# Altium PCB sense_logic.PcbDoc
Units mil, origin at the board's own origin, x right, y up, seen from the top; angles counter-clockwise.
Board outline 866.14 x 866.14 mil, 4 copper layers (Top Layer, Int1 (SIG/GND), Int2 (SIG/PWR), Bottom Layer), stack 53.912 mil thick; 27 components, 24 nets, 157 pads, 95 vias.
Unrouted connection lines stored in the file: 39.
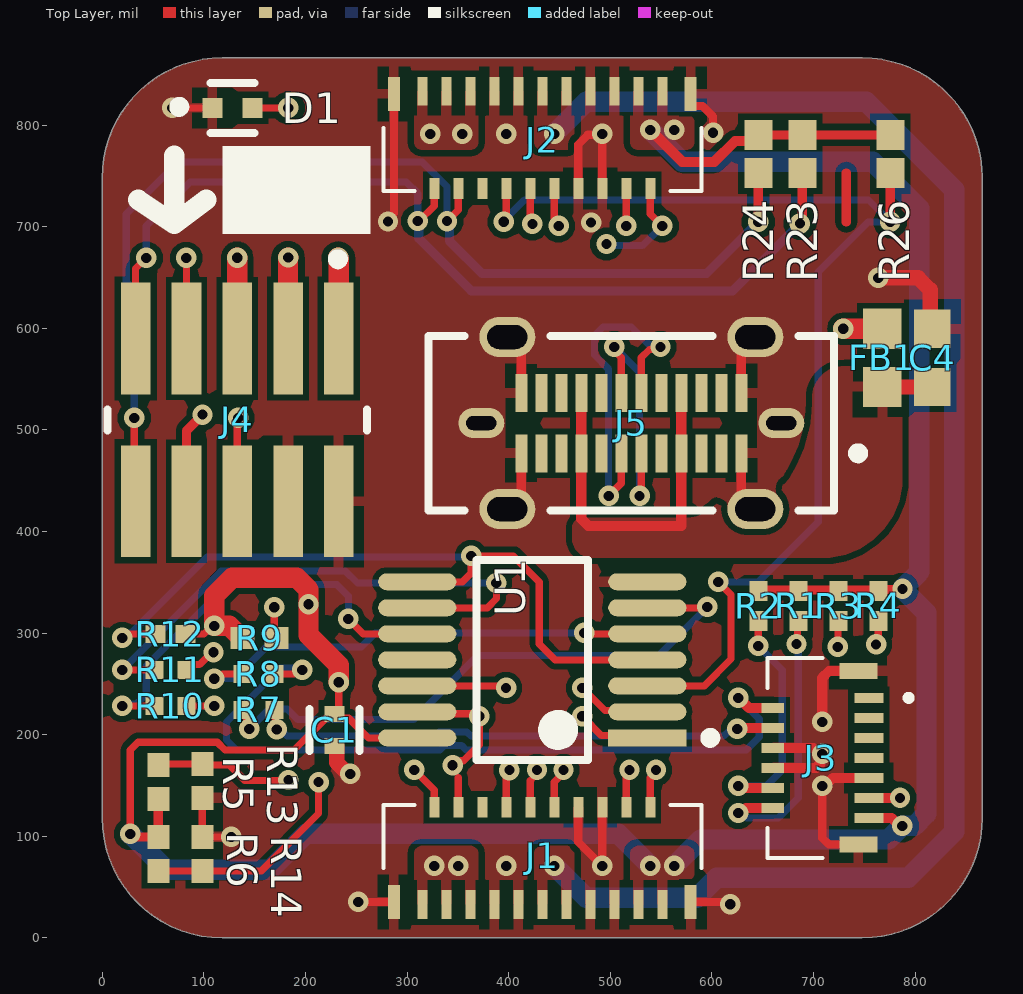
[diagram p0: Top Layer view]
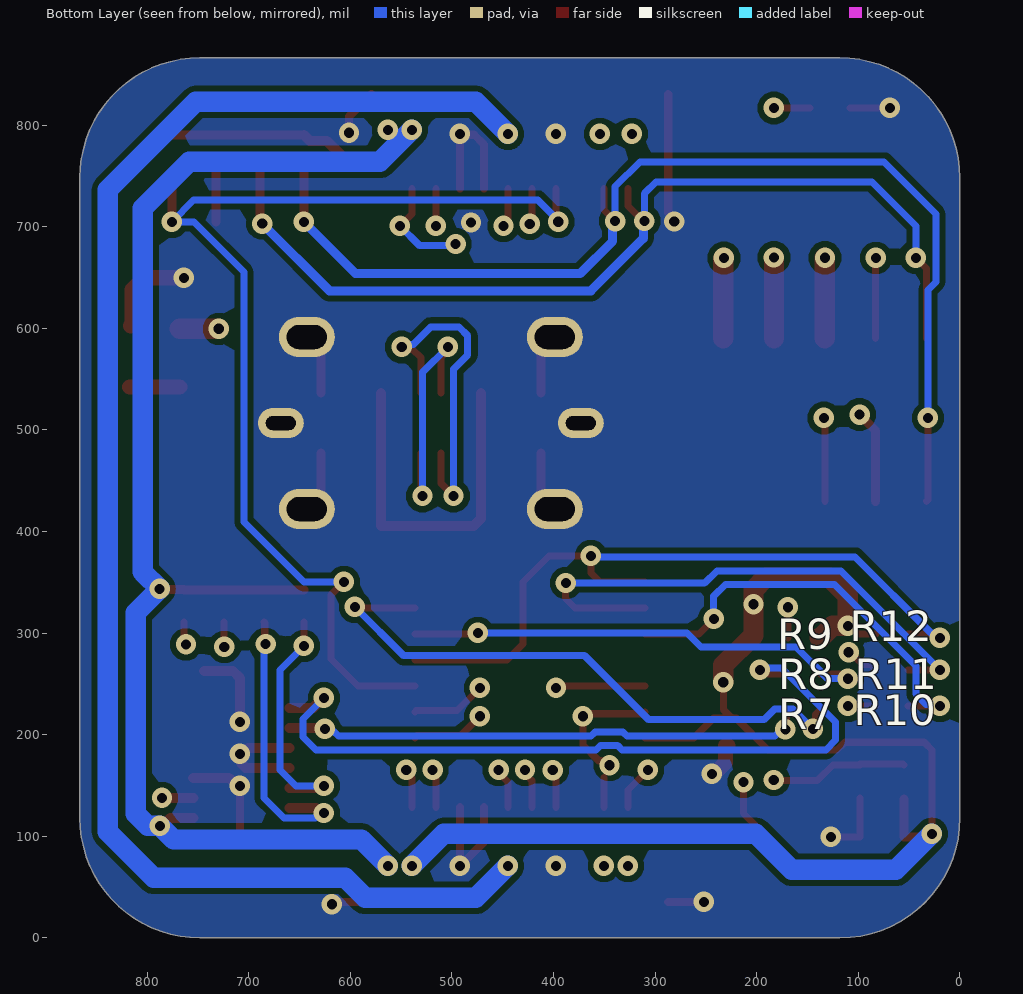
[diagram p1: Bottom Layer view, seen from below]
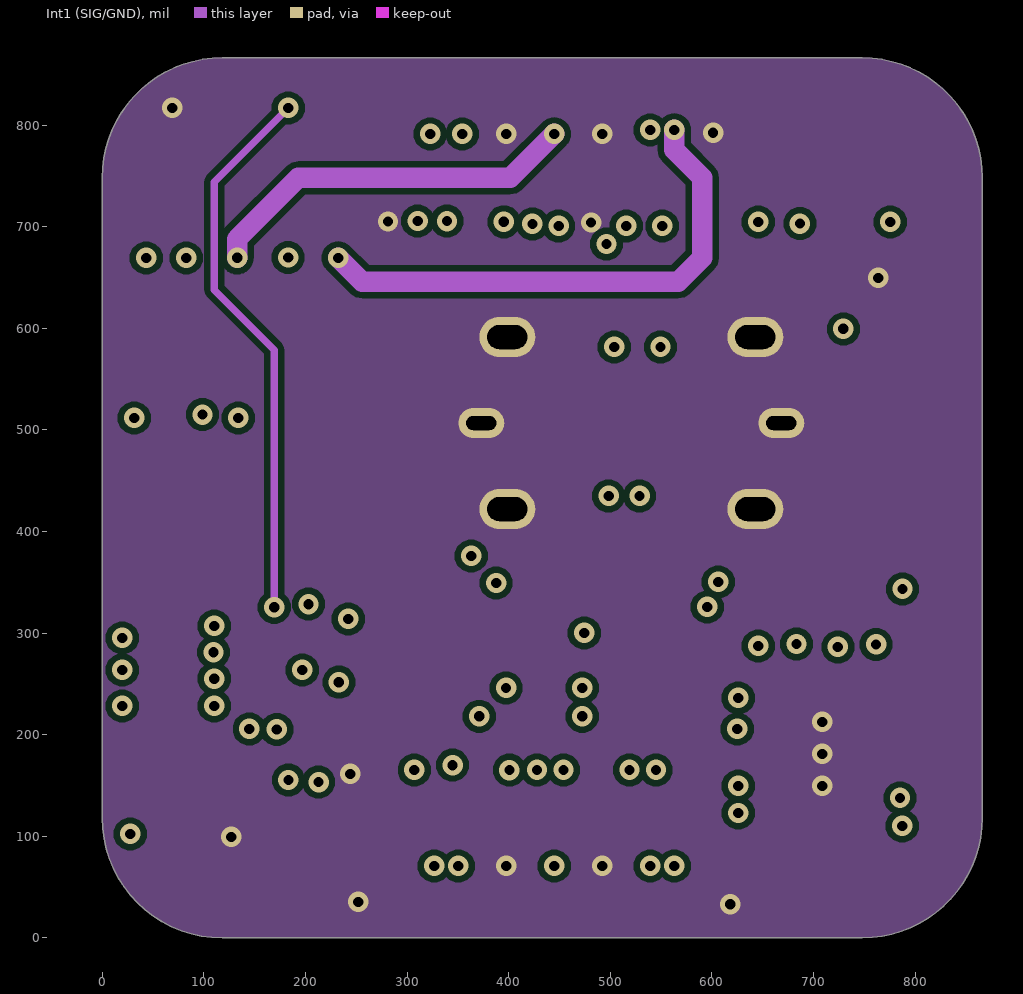
[diagram p2: Int1 (SIG/GND)]
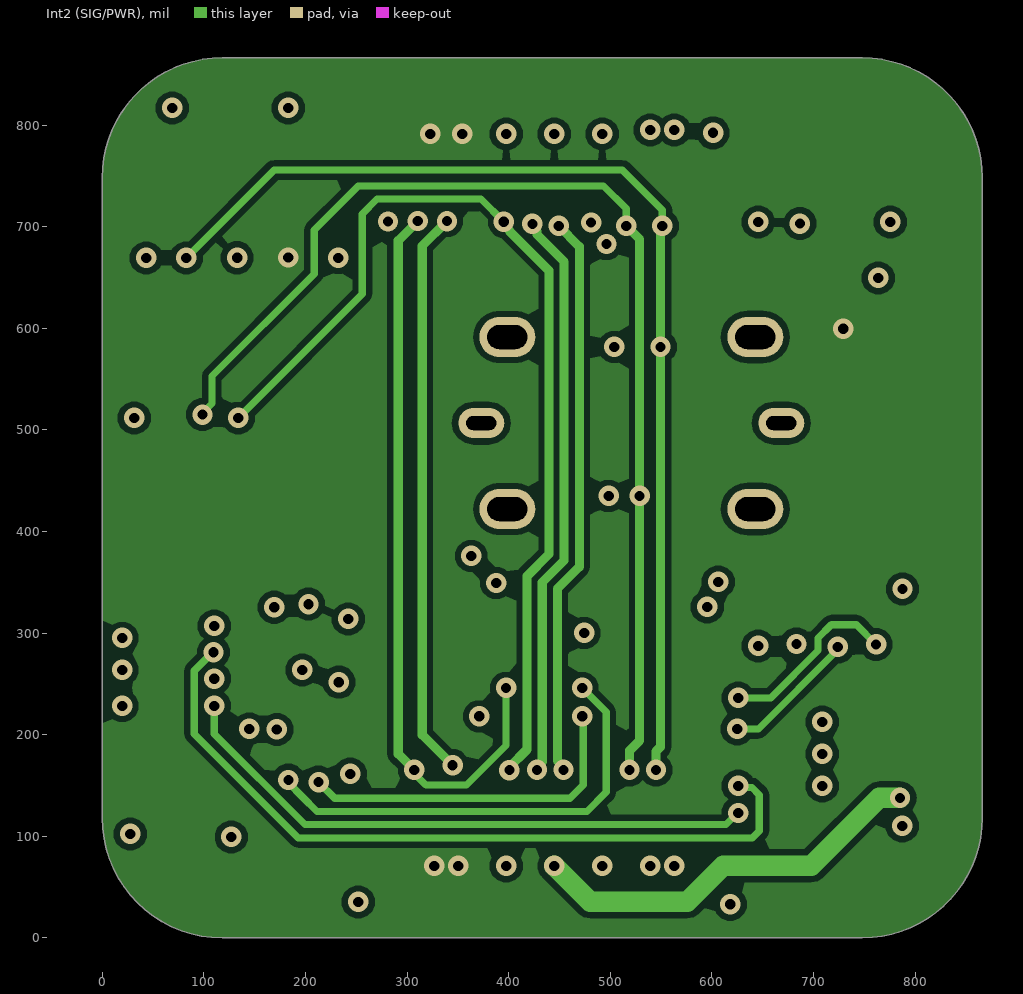
[diagram p3: Int2 (SIG/PWR)]

## Layer stack, top to bottom
Top Solder: solder mask 1, SM-001, Dk 4
Top Layer: signal copper 1.378
Dielectric 1: prepreg 5.1, PP-017, Dk 4.3
Dielectric 2: prepreg 5.1, PP-017, Dk 4.3
Int1 (SIG/GND): signal copper 1.378
Dielectric 3: core 28, Core-039, Dk 4.8
Int2 (SIG/PWR): signal copper 1.378
Dielectric 4: prepreg 5.1, PP-017, Dk 4.3
Dielectric 5: prepreg 5.1, PP-017, Dk 4.3
Bottom Layer: signal copper 1.378
Bottom Solder: solder mask 1, SM-001, Dk 4

## Board outline
0,118.11 0,748.03 cw(c118.11,748.03) 118.11,866.14 748.03,866.14 cw(c748.03,748.03) 866.14,748.03 866.14,118.11 cw(c748.03,118.11) 748.03,0 118.11,0 cw(c118.11,118.11)

## Design rules (kind name [scope] priority, off if disabled: settings)
Clearance [All] p1: gap=6 ignorepadtopadclearanceinfootprint=FALSE
PolygonConnect [All] p1: thpad.connectstyle=Direct thpad.reliefconductorwidth=10 thpad.reliefentries=4 thpad.polygonreliefangle="90 Angle" thpad.airgapwidth=10 smdpad.connectstyle=Relief smdpad.reliefconductorwidth=10 smdpad.reliefentries=4 smdpad.polygonreliefangle="90 Angle" smdpad.airgapwidth=10 via.connectstyle=Direct via.reliefconductorwidth=10 via.reliefentries=4 via.polygonreliefangle="90 Angle" via.airgapwidth=10
RoutingVias [All] p1: holewidth=28 width=50 viastyle="Through Hole" minholewidth=28 minwidth=50 maxholewidth=28 maxwidth=50
SolderMaskExpansion [IsVia] p1: expansion=4 istentingtop=TRUE
Width [All] p1: maxlimit=20 minlimit=6 preferedwidth=10
30 further rules are at their usual default settings.

## Classes and differential pairs
component class AUX_CONNECTOR: J4
component class LOGIC_CONNECTOR: J3 R1 R2 R3 R4
component class USB_CONNECTOR: C4 FB1 J5
component class SPINE_CONNECTOR: J1 J2
component class LOGIC: C1 D1 R5 R6 R7 R8 R9 R10 R11 R12 R13 R14 R23 R24 R26 U1

## Components (designator, comment, footprint, x,y, rotation, side; value= is the part's Value field where it differs from the comment)
C1 "0.1uF" FP-GRM15-MFG 228.35,204.72 r270 top value=0.10μF
C4 "22uF" FP-CL10-IPC_B 816.93,570.87 r90 top
D1 "QBLP595-IB" FP-QBLP595-IB-MFG 127.95,816.93 r0 top
FB1 "MPZ1608S601ATD25" FP-MPZ1608-0_8-IPC_B 767.72,570.87 r90 top
J1 "503566-2102" 5035662102 433.07,78.74 r0 top locked
J2 "503566-2102" 5035662102 433.07,787.4 r180 top locked
J3 "502078-1362" 5020781362 708.66,177.17 r90 top locked
J4 "FTSH-105-01-F-DV-K-TR" FP-FTSH-105-01-F-DV-K-TR-MFG 132.87,509.84 r180 top
J5 "204711-0001" FP-204711-0001-MFG 520.67,506.69 r180 top locked
R1 "1K" RESC1005X40X25LL05T10 685.04,326.77 r90 top
R2 "1K" RESC1005X40X25LL05T10 645.67,326.77 r90 top
R3 "1K" RESC1005X40X25LL05T10 724.41,326.77 r90 top
R4 "1K" RESC1005X40X25LL05T10 763.78,326.77 r90 top
R5 "DNP" RESC1005X40X25NL05T10 55.12,153.54 r270 top
R6 "DNP" RESC1005X40X25NL05T10 55.12,82.68 r90 top
R7 "33R" RESC1005X40X25LL05T05 153.54,224.41 r0 top
R8 "33R" RESC1005X40X25LL05T05 153.54,259.84 r0 top
R9 "330R" RESC1005X40X25NL05T10 154.53,295.28 r0 top
R10 "33R" RESC1005X40X25LL05T05 66.93,228.35 r0 top
R11 "33R" RESC1005X40X25LL05T05 66.93,263.78 r0 top
R12 "1K" RESC1005X40X25LL05T10 66.93,299.21 r0 top
R13 "DNP" RESC1005X40X25NL05T10 98.43,154.53 r90 top
R14 "DNP" RESC1005X40X25NL05T10 98.43,82.68 r270 top
R23 "DNP" RESC1005X40X25ML10T10 688.98,771.65 r90 top
R24 "DNP" RESC1005X40X25ML10T10 645.67,771.65 r90 top
R26 "DNP" RESC1005X40X25ML10T10 775.59,771.65 r90 top
U1 "TCA9543APWR" FP-PW0014A-IPC_A 423.23,273.62 r180 top locked

## Footprints (in the part's own frame and the unit in brackets; to place one, negate y for a bottom-side part, rotate by r counter-clockwise, add the part's x,y. Pads: shape width x height; smd on the part's side, far side on the other; paste and mask are expansions set on the pad)
5020781362 [mm]
  rect 0.25x0.72 smd: 1(1.5,-1.165) 3(1,-1.165) 5(0.5,-1.165) 7(0,-1.165) 9(-0.5,-1.165) 11(-1,-1.165) 13(-1.5,-1.165)
  rect 0.25x0.57 smd: 2(1.25,1.24) 4(0.75,1.24) 6(0.25,1.24) 8(-0.25,1.24) 10(-0.75,1.24) 12(-1.25,1.24)
  rect 0.4x0.95 smd: MP1(2.17,-0.9) MP2(-2.17,-0.9)
  silkscreen extent -2.5,-2.21 2.5,1.38, body extent -2.5,-1.63 2.5,1.36, height 1
5035662102 [mm]
  rect 0.25x0.72 smd: 1(-3,-1.165) 3(-2.4,-1.165) 5(-1.8,-1.165) 7(-1.2,-1.165) 9(-0.6,-1.165) 11(0,-1.165) 13(0.6,-1.165) 15(1.2,-1.165) 17(1.8,-1.165) 19(2.4,-1.165) 21(3,-1.165)
  rect 0.25x0.52 smd: 2(-2.7,1.265) 4(-2.1,1.265) 6(-1.5,1.265) 8(-0.9,1.265) 10(-0.3,1.265) 12(0.3,1.265) 14(0.9,1.265) 16(1.5,1.265) 18(2.1,1.265) 20(2.7,1.265)
  rect 0.3x0.85 smd: MP1(-3.71,-1.1) MP2(3.71,-1.1)
  silkscreen extent -3.98,-0.25 3.98,1.33, body extent -3.98,-1.54 3.98,1.31, height 0.95
FP-204711-0001-MFG [mm]
  rrect100% 1.4x1 hole 0.6 slot 1 at 0 deg paste-1000 mask+0: 1(-3.1,2.15) 2(3.1,2.15) 5(-3.1,-2.15) 6(3.1,-2.15)
  rrect100% 1.15x0.75 hole 0.35 slot 0.75 at 0 deg paste-1000 mask+0: 3(-3.75,0) 4(3.75,0)
  rect 0.3x0.95 smd paste+0 mask+0: A1(-2.75,0.755) A2(-2.25,0.755) A3(-1.75,0.755) A4(-1.25,0.755) A5(-0.75,0.755) A6(-0.25,0.755) A7(0.25,0.755) A8(0.75,0.755) A9(1.25,0.755) A10(1.75,0.755) A11(2.25,0.755) A12(2.75,0.755) B1(2.75,-0.755) B2(2.25,-0.755) B3(1.75,-0.755) B4(1.25,-0.755) B5(0.75,-0.755) B6(0.25,-0.755) B7(-0.25,-0.755) B8(-0.75,-0.755) B9(-1.25,-0.755) B10(-1.75,-0.755) B11(-2.25,-0.755) B12(-2.75,-0.755)
  silkscreen extent -5.79,-2.18 5.07,2.18, body extent -5.17,-2.75 5.17,2.75, height 0.25
FP-CL10-IPC_B [mil]
  rect 37.72x35.91 smd paste+0 mask+0: 1(-28.62,0) 2(28.62,0)
  body extent -57,-28 57,28, height 10
FP-FTSH-105-01-F-DV-K-TR-MFG [mm]
  rect 0.74x2.79 smd paste+0 mask+0: 1(-2.54,-2.035) 2(-2.54,2.035) 3(-1.27,-2.035) 4(-1.27,2.035) 5(0,-2.035) 6(0,2.035) 7(1.27,-2.035) 8(1.27,2.035) 9(2.54,-2.035) 10(2.54,2.035)
  silkscreen extent -3.24,-4.14 3.24,0.27, body extent -3.34,-3.53 3.34,3.53, height 0.25
FP-GRM15-MFG [mm]
  rect 0.4x0.5 smd paste+0 mask+0: 1(-0.4,0) 2(0.4,0)
  silkscreen extent -0.53,-0.63 0.53,0.63, body extent -0.7,-0.38 0.7,0.38, height 0.25
FP-MPZ1608-0_8-IPC_B [mil]
  rect 39.61x37.73 smd paste+0 mask+0: 1(-28.59,0) 2(28.59,0)
  body extent -58,-29 58,29, height 10
FP-PW0014A-IPC_A [mm]
  rect 1.955x0.421 smd paste+0 mask+0: 1(-2.875,1.95)
  rrect100% 1.955x0.421 smd paste+0 mask+0: 2(-2.875,1.3) 3(-2.875,0.65) 4(-2.875,0) 5(-2.875,-0.65) 6(-2.875,-1.3) 7(-2.875,-1.95) 8(2.875,-1.95) 9(2.875,-1.3) 10(2.875,-0.65) 11(2.875,0) 12(2.875,0.65) 13(2.875,1.3) 14(2.875,1.95)
  silkscreen extent -4.58,-2.5 1.4,2.5, body extent -4.35,-3 4.35,3, height 0.25
FP-QBLP595-IB-MFG [mm]
  rect 0.5x0.5 smd paste+0 mask+0: 1(-0.5,0) 2(0.5,0)
  silkscreen extent -1.45,-0.63 0.55,0.63, body extent -0.85,-0.4 0.85,0.4, height 0.25
RESC1005X40X25LL05T05 [mm] "Chip Resistor, 2-Leads, Body 1.00x0.50mm, IPC High Density"
  rect 0.45x0.45 smd: 1(-0.4,0) 2(0.4,0)
  body extent -0.53,-0.27 0.53,0.28, height 0.4
RESC1005X40X25LL05T10 [mm] "Chip Resistor, 2-Leads, Body 1.00x0.50mm, IPC High Density"
  rect 0.5x0.45 smd: 1(-0.375,0) 2(0.375,0)
  body extent -0.53,-0.27 0.53,0.28, height 0.4
RESC1005X40X25ML10T10 [mm] "Chip Resistor, 2-Leads, Body 1.00x0.50mm, IPC Low Density"
  rect 0.75x0.7 smd: 1(-0.475,0) 2(0.475,0)
  body extent -0.55,-0.3 0.55,0.3, height 0.4
RESC1005X40X25NL05T10 [mm] "Chip Resistor, 2-Leads, Body 1.00x0.50mm, IPC Medium Density"
  rect 0.6x0.55 smd: 1(-0.425,0) 2(0.425,0)
  body extent -0.53,-0.27 0.53,0.28, height 0.4

## Part data
C1: library part CMP-2100-03641-2, "CAP CER 0.1UF 16V X7R 0402", Capacitance=0.10μF, Manufacturer=Murata, Manufacturer Part Number=GRM155R71C104KA88D, Package=GRM15, Temperature="-55°C to +125°C", Temperature Characteristic=X7R, Temperature Range High=+125°C, Temperature Range Low=-55°C, Tolerance=10%, Voltage Rating=16Vdc, Category=Cap, ComponentLink2Description=Datasheet, ComponentLink2URL=https://search.murata.co.jp/Ceramy/image/img/A01X/G101/ENG/GRM155R71H471KA01-01A.pdf, Device Class L1="Passive Components", Device Class L2=Capacitors, Device Class L3="Ceramic Capacitors", Digikey Description="CAP CER 0.1UF 16V X7R 0402", Height=0.55mm, Ipc Land Pattern Name=CAPC10050X219, Lead Free=yes, Material=Ceramic, Mouser Description="0402 0.1 uF 16V ±10 % Tolerance X7R SMT Multilayer Ceramic Capacitor", Octopart=https://octopart.com/grm155r71c104ka88d-murata-196880, RoHS=TRUE, Standoff Height=0mm
C4: library part CMP-13271-003290-1, "Cap Ceramic 22uF 10V X5R ±20% Pad SMD 0603 +85°C T/R", Case Code (Imperial)=0603, Case Code (Metric)=1608, Max Operating Temperature=85°C, Min Operating Temperature=-55°C, Tolerance=20%, Voltage Rating=10V, Capacitance=22uF, Case/Package=0603, Length=0.063inch, Mount="Surface Mount", Packaging="Tape and Reel", Thickness=0.037inch, Width=0.031inch
D1: library part CMP-113271-000002-1, "LED BLUE CLEAR 0402 SMD", Case Code (Imperial)=0402, Case Code (Metric)=1005, Color=Blue, Forward Voltage=3.1V, Lens Color=Colorless, Test Current=20mA, Case/Package=0402, Dominant Wavelength=465nm, Height=0.6mm, Length=1mm, Lens Size=0.5mm, Lens Style=Flat, Lens Transparency=Clear, Luminous Intensity=85mcd, Mount="Surface Mount", Packaging="Tape and Reel", Viewing Angle=140°, Width=0.5mm
FB1: library part CMP-08257-000403-1, "Power line Ferrite Bead 600Ω @ 100MHz 1A DCR 0.15Ω AEC-Q200 SMD 0603", Case Code (Imperial)=0603, Case Code (Metric)=1608, DC Resistance (DCR)=150mR, Max Current Rating=1A, Max Operating Temperature=125°C, Min Operating Temperature=-55°C, Package Quantity=4000, Ratings=AEC-Q200, Test Frequency=100MHz, Tolerance=25%, Case/Package=0603, Height=0.037inch, Impedance=600R, Lead Free="Lead Free", Length=0.063inch, Max DC Current=1A, Mount="Surface Mount", Number of Lines=1, Packaging="Tape and Reel", RoHS Compliant=Yes, Series=MPZ, Termination=SMD/SMT, Weight=7.1E-05oz, Width=0.031inch
J1 J2: "Connector", Manufacturer_Name=Molex, Mouser Part Number=538-503566-2102, Datasheet Link=https://www.molex.com/pdm_docs/sd/5035662102_sd.pdf, Height=1.69mm, Manufacturer_Part_Number=503566-2102, Mouser Price/Stock=https://www.mouser.co.uk/ProductDetail/Molex/503566-2102?qs=0lSvoLzn4L8%252Bw2FHrppS3g%3D%3D
J3: "Connector", Manufacturer_Name=Molex, Mouser Part Number=538-502078-1362, Datasheet Link=https://www.molex.com/pdm_docs/sd/5020781362_sd.pdf, Height=1.7mm, Manufacturer_Part_Number=502078-1362, Mouser Price/Stock=https://www.mouser.co.uk/ProductDetail/Molex/502078-1362?qs=GBLSl2Akirt8csfPYHMErA%3D%3D
J4: library part CMP-02766-000004-2, "CONN HEADER SMD 10POS 1.27MM", Housing Color=Black, Max Current Rating=1.75A, Max Operating Temperature=125°C, Min Operating Temperature=-55°C, Contact Material=Bronze, Contact Plating=Gold, Depth=3.43mm, Housing Material=Polymer, Lead Free="Lead Free", Length=6.35mm, Number Of Contacts=10, Number of Rows=2, Orientation=Straight, Packaging="Tape and Reel", Pitch=1.27mm, Radiation Hardening=No, Termination=Solder
J5: library part CMP-04767-000011-1, "USB VERTICAL TYPE C 3.1"
R1 R2 R3 R4 R12: library part CMP-2002-07941-1, Manufacturer="Yageo / Phycomp", Part Number=RC0402JR-071KL
R5 R6 R13 R14: library part CMP-1011-00001-2, Manufacturer="Yageo / Phycomp", Part Number=RC0402JR-070RL
R7 R8 R10 R11: library part CMP-2002-01146-1, Manufacturer=Panasonic, Part Number=ERJ2RKF33R0X
R9: library part CMP-2002-07985-1, Manufacturer="Yageo / Phycomp", Part Number=RC0402JR-07330RL
R23 R24 R26: library part CMP-2002-05837-1, Manufacturer=Panasonic, Part Number=ERA-2AED104X
U1: library part CMP-04892-000047-1, "IC BUS SWITCH 2 X 1:2 14TSSOP", Case/Package=TSSOP, High Level Output Current=10uA, Max Operating Temperature=85°C, Max Supply Voltage=5.5V, Min Operating Temperature=-40°C, Min Supply Voltage=1.65V, On-State Resistance=16R, Package Quantity=2000, Independent Circuits=1, Lead Free="Lead Free", Mount="Surface Mount", Number of Pins=14, Packaging="Tape and Reel", Propagation Delay=1ns, RoHS Compliant=Yes, Supply Type=Single, Weight=0.002018oz

## Via types
v1: diameter 20, hole 10, Top Layer to Bottom Layer, tented both sides, 95 vias

## Nets (pads, with @x,y where several pads share a name; then routed paths per layer and width w, separated by ;. In a path a pad name is that pad's centre, name@x,y a point inside that pad or via, vN(x,y) a via of type N, cw(c..) or ccw(c..) an arc to the next point about the centre after c; other vN are vias at no path point)
1V8: J1.11 J1.13 J2.9 J2.11 J3.11 J4.5 | length 2389.2
  Top Layer w10: J3.11 v1(785.21,137.8)
  Top Layer w20: v1(132.8,669.39) 132.87,669.32 J4.5
  Int1 (SIG/GND) w20: v1(132.8,669.39) 132.8,687.92 192.91,748.03 401.57,748.03 v1(444.88,791.34)
  Int2 (SIG/PWR) w20: v1(444.88,70.87) 480.31,35.43 575.79,35.43 611.22,70.87 697.83,70.87 764.76,137.8 v1(785.21,137.8)
  Bottom Layer w20: v1(444.88,70.87) 476.38,39.37 585.28,39.37 604.96,59.06 793.31,59.06 838.58,104.33 838.58,736.22 751.97,822.83 476.38,822.83 v1(444.88,791.34)
3V3: C1.1 J1.19 J1.21 J2.1 J2.3 J3.13 J4.1 R1.2 R2.2 R3.2 R4.2 R5.2 R6.2 R9.1 R12.2 R23.2 R24.2 R26.2 U1.14 | length 3564.6
  Top Layer w7: v1(27.56,102.36) 27.56,185.04 35.09,192.57 113.19,192.57 120.9,184.85 188.79,184.85 220.04,216.1 223.97,216.1 C1.1 ; R12.2@82.68,299.21 100.13,299.21 108,307.09 v1(110.24,307.09) ; v1(232.81,251.59) 232.81,224.85 228.44,220.47 C1.1 ; U1.14 261.96,196.85 242.63,216.19 232.63,216.19 C1.1
  Top Layer w9: v1(27.56,102.36) 30.51,99.41 R6.2 R5.2 ; R2.2@645.67,342.52 763.78,342.52 764.27,343.01 787.09,343.01 v1(787.59,343.5) ; R24.2 R23.2 R26.2
  Top Layer w10: v1(539.37,795.28) 570.87,763.78 602.36,763.78 622.75,784.16 639.48,784.16 R24.2 ; J3.13 776.82,118.11 784.7,110.24 v1(787.4,110.24)
  Top Layer w20: R9.1 136.81,295.28 125,307.09 v1(110.24,307.09) 110.24,336.61 127.95,354.33 191.36,354.33 203.07,342.61 v1(203.07,328.42) 203.07,297.91 232.81,268.17 v1(232.81,251.59) ; v1(232.28,669.29) 232.87,668.7 J4.1
  Int1 (SIG/GND) w20: v1(232.28,669.29) 255.91,645.67 566.93,645.67 590.55,669.29 590.55,748.03 562.99,775.59 v1(562.99,795.28)
  Int2 (SIG/PWR) w7: v1(110.24,307.09) v1@111.81,307.09
  Bottom Layer w20: v1(27.56,102.36) 62.99,66.93 165.35,66.93 200.79,102.36 507.87,102.36 v1(539.37,70.87) ; v1(539.37,795.28) 570.87,763.78 758.51,763.78 804.13,718.15 804.13,360.05 v1(787.59,343.5) 811.21,319.88 811.21,121.95 799.49,110.24 v1(787.4,110.24) 774.03,96.87 588.99,96.87 v1(562.99,70.87)
5V: FB1.2 J1.1 J1.3 J1.5 J2.17 J2.19 J2.21 J4.3 | length 118
  Top Layer w20: J4.3 182.87,669.41 v1(183.03,669.56) ; v1(729.37,599.45) FB1.2
  other v1: 326.77,70.87 350.39,70.87 322.83,791.34 354.33,791.34
GND: C1.2 C4.2 D1.1 J1.7 J1.9 J1.14 J1.15 J1.16 J1.17 J1.MP1 J1.MP2 J2.5 J2.6 J2.7 J2.8 J2.13 J2.15 J2.MP1 J2.MP2 J3.6 J3.8 J3.9 J3.MP1 J3.MP2 J4.2 J4.4 J5.1 J5.2 J5.3 J5.4 J5.5 J5.6 J5.A1 J5.A12 J5.B1 J5.B12 R13.1 R14.1 U1.7 | length 1303.5
  Top Layer w7: v1(68.9,816.93) D1.1 ; R13.1 R14.1 v1(126.97,99.41)
  Top Layer w8: v1(251.97,35.43) J1.MP1 ; v1(281.18,705.04) 281.18,707.65 287.01,713.48 J2.MP2 ; J1.14 468.5,94.49 v1(492.13,70.87) J1.16 ; J2.8 468.5,781.04 477.91,790.44 491.23,790.44 v1(492.13,791.34) J2.6 ; J1.MP2 612.49,35.43 614.86,33.06 v1(618.11,33.06) ; J2.MP1 579.13,820.81 581.04,818.9 590.94,818.9 601.29,808.55 v1(601.29,792.41) ; v1(708.66,149.61) 708.66,98.43 715.35,91.73 J3.MP2
  Top Layer w9: J5.2 398.62,422.39 412.4,436.17 J5.A12 ; J5.6 398.62,590.99 412.4,577.21 J5.B1 ; J5.A1 628.94,436.17 642.72,422.39 J5.1 ; J5.B12 628.94,577.21 642.72,590.99 J5.5
  Top Layer w10: J3.8 702.8,167.32 706.75,171.27 ; J3.6 700.05,187.01 705.96,181.1 v1(708.66,181.1) ; v1(708.66,149.61) 711.37,149.61 719.24,157.48 J3.9 ; v1(708.66,212.6) 708.66,255.91 715.35,262.6 J3.MP1
  Top Layer w15: C1.2 230.32,188.98 230.69,188.6 230.69,172.7 241.02,162.37 243.14,162.37 v1(244.09,161.42) ; v1(763.78,649.61) 803.15,649.61 814.93,637.82 814.93,603.45 C4.2@815.94,602.44
  other v1: 397.64,70.87 481.14,704.13 397.64,791.34
I2C_CH1_SCK: J3.4 R3.1 R7.2 | length 676.3
  Top Layer w7: R7.2 170.53,223.17 170.53,206.41 v1(171.76,205.18) ; v1(723.98,286.41) 724.19,286.63 724.19,310.81 R3.1@724.41,311.02
  Top Layer w10: v1(625,205.71) 625.98,206.69 J3.4
  Int2 (SIG/PWR) w7: v1(625,205.71) 645.79,205.71 723.98,283.89 v1(723.98,286.41)
  Bottom Layer w7: v1(171.76,205.18) 175.28,205.18 181.86,198.59 327.57,198.59 331.4,202.43 359.16,202.43 362.99,198.59 611.63,198.59 616.26,203.22 622.51,203.22 v1(625,205.71)
I2C_CH1_SDA: J3.2 R4.1 R8.2 | length 963
  Top Layer w7: R8.2 189.4,259.84 193.33,263.78 v1(196.85,263.78) ; v1@763.78,295.28 R4.1@763.78,311.02
  Top Layer w10: v1(625.98,236.22) 626.62,236.22 636.46,226.38 J3.2
  Int2 (SIG/PWR) w7: v1(625.98,236.22) 657.92,236.22 704.48,282.78 704.48,294.49 704.54,294.55 704.54,295.09 717.57,308.12 742.46,308.12 v1(761.69,288.89)
  Bottom Layer w7: v1(196.85,263.78) 194.88,265.75 175.56,265.75 122.24,212.43 122.24,194.69 131.89,185.04 332.4,185.04 336.79,189.43 353.77,189.43 358.16,185.04 633.86,185.04 646.65,197.83 646.65,215.55 v1(625.98,236.22)
I2C_CH2_SCK: J3.12 R1.1 R10.2 | length 892.4
  Top Layer w7: R10.2 v1(110.24,228.35) ; v1(683.28,289.16) 684.16,290.04 684.16,310.14 R1.1@685.04,311.02
  Top Layer w10: v1(625.98,122.87) 628.69,122.87 633.67,127.85 636.36,127.85 636.46,127.95 J3.12
  Int2 (SIG/PWR) w7: v1(110.24,228.35) 110.24,200.79 199.6,111.43 613.82,111.43 625.27,122.87 v1(625.98,122.87)
  Bottom Layer w7: v1(625.98,122.87) 629.5,122.87 634.26,118.11 665.35,118.11 685.04,137.8 685.04,287.4 v1(683.28,289.16)
I2C_CH2_SDA: J3.10 R2.1 R11.2 | length 1023.6
  Top Layer w7: R11.2 88.02,269.13 95.9,269.13 107.87,281.1 v1(109.45,281.1) ; v1(645.67,287.4) R2.1@645.67,311.02
  Top Layer w10: v1(625.98,149.61) 628.69,149.61 630.66,147.64 J3.10
  Int2 (SIG/PWR) w7: v1(109.45,281.1) 108.67,281.1 90.55,262.98 90.55,200.79 192.91,98.43 639.76,98.43 646.65,105.32 646.65,140.75 639.39,148.02 627.57,148.02 v1(625.98,149.61)
  Bottom Layer w7: v1(625.98,149.61) 653.54,149.61 669.29,165.35 669.29,263.78 v1(645.67,287.4)
NetC4_1: C4.1 FB1.1 J5.A4 J5.A9 J5.B4 J5.B9 | length 405.4
  Top Layer w10: J5.B4 J5.A9 471.46,412.4 478.35,405.51 569.88,405.51 J5.A4 J5.B9
  Top Layer w15: FB1.1 C4.1
NetD1_2: D1.2 R9.2 | length 611.7
  Top Layer w7: D1.2 v1(183.07,816.93) ; R9.2@169.29,295.28 v1(169.29,325.4)
  Int1 (SIG/GND) w7: v1(169.29,325.4) 169.29,578.74 110.24,637.8 110.24,744.09 v1(183.07,816.93)
NetR5_1: R5.1 R13.2 U1.2 | length 656.3
  Top Layer w7: R5.1 56.1,171.26 R13.2 ; R13.2@98.43,170.28 125,170.28 140.23,155.04 182.79,155.04 v1(183.17,155.43) ; v1(472.44,246.06) 494.86,223.64 535.23,223.64 U1.2
  Int2 (SIG/PWR) w7: v1(183.17,155.43) 183.17,152.61 196.85,138.93 211.35,124.43 476.99,124.43 496.06,143.5 496.06,222.44 v1(472.44,246.06)
NetR6_1: R6.1 R14.2 U1.1 | length 625.3
  Top Layer w7: R6.1 R14.2 156.5,65.94 212.94,122.39 v1(212.94,153.24) ; v1(472.44,218.09) 491.54,199 534.29,199 U1.1
  Int2 (SIG/PWR) w7: v1(212.94,153.24) 228.75,137.43 460.26,137.43 473.44,150.61 473.44,217.09 v1(472.44,218.09)
NetR7_1: R7.1 U1.6 | length 590.1
  Top Layer w7: R7.1 142.22,219.98 142.22,208.19 v1(144.71,205.7) ; U1.6 594.49,324.8 v1(595.47,325.79)
  Bottom Layer w7: v1(144.71,205.7) 164.1,225.09 182.39,225.09 192.73,214.75 306.29,214.75 369.28,277.74 547.43,277.74 v1(595.47,325.79)
NetR8_1: R8.1 U1.5 | length 474.8
  Top Layer w7: v1(110.24,255.09) 113.75,255.09 118.51,259.84 R8.1 ; v1(474.41,300.2) 475.39,299.21 U1.5
  Bottom Layer w7: v1(110.24,255.09) 130.09,255.09 161.42,286.42 254.92,286.42 268.7,300.2 v1(474.41,300.2)
NetR10_1: R10.1 U1.10 | length 421.3
  Top Layer w7: v1(19.68,228.35) R10.1 ; v1(242.13,313.98) 256.89,299.21 U1.10
  Bottom Layer w7: v1(19.68,228.35) 21.28,229.94 33.09,229.94 43.31,240.16 43.31,267.73 123.49,347.92 230.82,347.92 242.5,336.24 242.5,314.35 v1(242.13,313.98)
NetR11_1: R11.1 U1.9 | length 542.2
  Top Layer w7: v1(19.68,263.78) R11.1 ; U1.9 378.94,324.8 388.07,333.94 388.07,348.93 v1(387.75,349.24)
  Bottom Layer w7: v1(19.68,263.78) 117.13,361.22 239.17,361.22 251.15,349.24 v1(387.75,349.24)
NetR12_1: R12.1 U1.4 U1.8 | length 725.9
  Top Layer w7: v1@27.14,299.21 R12.1@51.18,299.21 ; U1.8 354.33,350.39 363.19,359.25 v1(363.19,375.98) 404.53,375.98 430.12,350.39 430.12,289.37 445.87,273.62 U1.4
  Bottom Layer w7: v1(19.68,295.28) 23.2,295.28 28.73,300.8 29.15,300.8 103.35,375 362.2,375 v1(363.19,375.98)
SPINE_I2C_SCL: J1.2 J2.20 J4.9 R23.1 U1.12 | length 1823.5
  Top Layer w7: J4.9 32.87,658.69 43.31,669.12 v1(43.31,669.29) ; v1(307.1,165.36) 326.77,145.67 J1.2 ; U1.12 395.53,248.03 v1(397.5,246.06) ; v1(310.5,705.61) 311.91,705.61 326.77,720.47 J2.20
  Top Layer w9: v1(686.62,703.01) 686.62,705.99 688.98,708.35 R23.1
  Int2 (SIG/PWR) w7: v1(307.1,165.36) 307.1,161.85 312.81,156.13 ; 312.81,156.08 318.47,150.43 358.48,150.43 397.5,189.45 v1(397.5,246.06)
  Int2 (SIG/PWR) w9: v1(307.1,165.36) 291.34,181.12 291.34,686.22 310.5,705.37 v1(310.5,705.61)
  Bottom Layer w7: v1(43.31,669.29) 43.31,700.79 86.61,744.09 299.21,744.09 310.5,732.81 v1(310.5,705.61)
  Bottom Layer w9: v1(310.5,705.61) 311.45,704.66 311.45,688.55 363.19,636.81 620.42,636.81 v1(686.62,703.01)
SPINE_I2C_SDA: J1.4 J2.18 J4.10 R24.1 U1.13 | length 1824.4
  Top Layer w7: v1(31.5,511.81) 31.5,431.1 J4.10 ; U1.13 311.85,220.61 365.03,220.61 367.55,218.09 v1(371.06,218.09) 371.06,189.96 355.44,174.34 352.79,174.34 348.38,169.93 v1(344.86,169.93) ; v1(339.31,705.43) 350.39,716.54 J2.18 ; J1.4 350.39,157.9
  Top Layer w9: v1(645.67,704.72) R24.1
  Int2 (SIG/PWR) w9: v1(339.31,705.43) 314.96,681.08 314.96,199.83 v1(344.86,169.93)
  Bottom Layer w7: v1(31.5,511.81) 31.5,637.8 23.62,645.67 23.62,712.6 74.8,763.78 314.96,763.78 339.31,739.43 v1(339.31,705.43)
  Bottom Layer w9: v1(339.31,705.43) 341.8,702.94 341.8,685.76 373.83,653.73 594.67,653.73 v1(645.67,704.72)
SPINE_SIG_CH1: J1.8 J2.14 J4.6 R26.1 U1.3 | length 2216.1
  Top Layer w7: J4.6 132.87,510.83 v1(133.86,511.81) ; v1(395.21,704.8) 397.64,707.23 J2.14 ; J1.8 397.64,158.49 400.69,161.54 v1(400.69,165.06) ; U1.3 592.52,248.03 618.91,274.42 618.91,337.78 v1(606.3,350.39)
  Top Layer w9: v1(775.59,704.72) R26.1
  Int2 (SIG/PWR) w7: v1(133.86,511.81) 255.91,633.86 255.91,712.6 270.46,727.16 372.85,727.16 v1(395.21,704.8)
  Int2 (SIG/PWR) w9: v1(395.21,704.8) 395.21,701.82 400.71,696.32 400.71,695.75 439.65,656.81 439.65,377.74 418,356.1 418,185.34 400.69,168.04 v1(400.69,165.06)
  Bottom Layer w7: v1(395.21,704.8) 395.21,705.93 415.43,726.16 754.16,726.16 v1(775.59,704.72) 753.94,704.72 704.72,655.51 704.72,409.45 645.67,350.39 v1(606.3,350.39)
SPINE_SIG_CH2: J1.10 J2.12 | length 625
  Top Layer w7: J1.10 421.26,154.75 422.41,155.9 ; J2.12 421.26,704.76 v1(423.31,702.71)
  Int2 (SIG/PWR) w9: v1(423.31,702.71) 423.31,699.73 427.96,695.08 427.96,692.12 454.65,665.43 454.65,371.53 433,349.88 433,173.39 427.94,168.33 v1(427.94,165.35)
SPINE_SIG_CH3: J1.12 J2.10 | length 634.5
  Top Layer w7: J1.12 444.88,153.54 453.94,162.6 v1(453.94,165.35) ; J2.10 444.88,708.24 449.24,703.89 v1(449.24,700.76)
  Int2 (SIG/PWR) w9: v1(449.24,700.76) 449.3,700.76 469.65,680.41 469.65,365.32 448,343.67 448,174.27 453.94,168.33 v1(453.94,165.35)
USB_DN: J1.20 J2.2 J4.7 J5.A7 J5.B7 | length 1633.9
  Top Layer w7: v1(82.68,669.29) 82.87,669.09 J4.7 ; v1(498.44,435.04) 510.83,447.43 J5.A7 ; J5.B7 530.51,571.09 538.62,579.21 546.89,579.21 v1(549.38,581.69) ; J1.20 v1@539.37,157.9 ; J2.2 539.37,712.6 v1(551.18,700.79)
  Int2 (SIG/PWR) w7: v1(82.68,669.29) 169.29,755.91 511.81,755.91 551.18,716.54 v1(551.18,700.79) ; v1@496.06,682.78 v1(496.25,682.97)
  Int2 (SIG/PWR) w9: v1(544.94,165.35) 544.94,183.41 549.38,187.85 v1(549.38,581.69) 549.38,698.99 v1(551.18,700.79)
  Bottom Layer w7: v1(496.25,682.97) 497.93,681.29 531.68,681.29 v1(551.18,700.79) ; v1(498.44,435.04) 498.44,559.61 484.44,573.62 484.44,592.7 492.93,601.19 520.85,601.19 537.87,584.18 546.89,584.18 v1(549.38,581.69)
USB_DP: J1.18 J2.4 J4.8 J5.A6 J5.B6 | length 1538.2
  Top Layer w7: v1(503.94,581.69) 503.94,578.18 510.83,571.29 J5.B6 ; J1.18 515.75,158.64 518.94,161.84 v1(518.94,165.35) ; v1(515.75,700.79) J2.4 ; v1(528.88,435.04) 530.51,436.67 J5.A6
  Top Layer w9: J4.8 82.87,499.19 v1(98.68,514.99)
  Int2 (SIG/PWR) w7: v1(98.68,514.99) 98.68,516.56 107.99,525.87 107.99,552.87 208.66,653.54 208.66,696.85 251.97,740.16 493.43,740.16 515.75,717.84 v1(515.75,700.79)
  Int2 (SIG/PWR) w9: v1(515.75,700.79) 528.88,687.65 v1(528.88,435.04) 528.88,194.24 518.94,184.3 v1(518.94,165.35)
  Bottom Layer w7: v1(503.94,581.69) 528.88,556.75 v1(528.88,435.04)
pads on no net: J1.6 J2.16 J3.1 J3.3 J3.5 J3.7 J5.A2 J5.A3 J5.A5 J5.A8 J5.A10 J5.A11 J5.B2 J5.B3 J5.B5 J5.B8 J5.B10 J5.B11 U1.11
copper on no net: | length 48.2
  Top Layer w9: 732.28,704.72 732.28,752.95

## Polygon pours and split planes (outlines as drawn)
GND on Top Layer "TOP GND" (solid, pour order 26): 0,118.11 0,748.03 cw(c118.11,748.03) 118.11,866.14 748.03,866.14 cw(c748.03,748.03) 866.14,748.03 866.14,118.11 cw(c748.03,118.11) 748.03,0 118.11,0 cw(c118.11,118.11)
NetC4_1 on Top Layer "USB_PWR_CON" (solid, pour order 22): 787.4,562.57 787.4,452.76 cw(c708.66,452.76) 708.66,374.02 482.28,374.02 cw(c482.28,393.7) 462.6,393.7 462.6,403.54 cw(c472.44,403.54) 472.44,413.39 573.03,413.39 ccw(c573.03,455.69) 602.94,425.78 cw(c644.31,384.41) 644.32,442.91 659.45,442.91 ccw(c659.45,462.6) 676.62,452.97 cw(c791.87,388.41) 679.19,457.36 ccw(c565.17,527.08) 698.82,527.09 698.82,531.5 cw(c729.9,531.5) 729.9,562.57
GND on Top Layer "GND_L01_P025" (solid, pour order 25): 718.5,226.38 698.82,226.38 ccw(c698.82,216.54) 688.98,216.54 688.98,137.8 ccw(c698.82,137.79) 698.82,127.95 718.5,127.95 ccw(c718.5,137.79) 728.35,137.8 728.35,216.54 ccw(c718.5,216.54)
3V3 on Top Layer "3V3_L01_P021" (solid, pour order 21): 539.37,775.59 574.8,775.59 ccw(c574.8,783.46) 582.68,783.46 582.68,803.15 ccw(c576.73,803.15) 576.73,809.09 532.56,809.09
3V3 on Top Layer "3V3_L01_P018" (solid, pour order 18): 539.37,90.55 574.8,90.55 cw(c574.8,82.68) 582.68,82.68 582.68,62.99 cw(c576.73,62.99) 576.73,57.05 532.56,57.05
5V on Top Layer "5V_L01_P013" (solid, pour order 13): 314.96,15.75 362.2,15.75 ccw(c362.21,23.62) 370.08,23.62 370.08,82.68 ccw(c362.2,82.68) 362.2,90.55 314.96,90.55 ccw(c314.96,82.68) 307.09,82.68 307.09,23.62 ccw(c314.96,23.62)
3V3 on Top Layer "3V3_L01_P012" (solid, pour order 12): 559.06,15.75 559.06,82.68 ccw(c551.18,82.68) 551.18,90.55 527.56,90.55 ccw(c527.56,82.68) 519.69,82.68 519.69,15.75
GND on Top Layer "GND_L01_P011" (solid, pour order 11): 511.81,15.75 511.81,82.68 ccw(c503.94,82.68) 503.94,90.55 480.32,90.55 ccw(c480.32,82.68) 472.44,82.68 472.44,15.75
1V8 on Top Layer "1V8_L01_P010" (solid, pour order 10): 464.57,15.75 464.57,82.68 ccw(c456.69,82.68) 456.69,90.55 433.07,90.55 ccw(c433.07,82.68) 425.2,82.68 425.2,15.75
GND on Top Layer "GND_L01_P009" (solid, pour order 9): 417.32,15.75 417.32,82.68 ccw(c409.45,82.68) 409.45,90.55 385.83,90.55 ccw(c385.83,82.68) 377.95,82.68 377.95,15.75
3V3 on Top Layer "3V3_L01_P008" (solid, pour order 8): 519.69,850.39 519.69,783.46 ccw(c527.56,783.46) 527.56,775.59 551.18,775.59 ccw(c551.18,783.46) 559.06,783.46 559.06,850.39
GND on Top Layer "GND_L01_P007" (solid, pour order 7): 472.44,850.39 472.44,783.46 ccw(c480.31,783.46) 480.32,775.59 503.94,775.59 ccw(c503.94,783.46) 511.81,783.46 511.81,850.39
1V8 on Top Layer "1V8_L01_P003" (solid, pour order 3): 425.2,850.39 425.2,783.46 ccw(c433.07,783.46) 433.07,775.59 456.69,775.59 ccw(c456.69,783.46) 464.57,783.46 464.57,850.39
GND on Top Layer "GND_L01_P002" (solid, pour order 2): 417.32,850.39 377.95,850.39 377.95,783.46 ccw(c385.83,783.46) 385.83,775.59 409.45,775.59 ccw(c409.45,783.46) 417.32,783.46
5V on Top Layer "5V_L01_P001" (solid, pour order 1): 362.2,850.39 314.96,850.39 ccw(c314.96,842.52) 307.09,842.52 307.09,783.46 ccw(c314.96,783.46) 314.96,775.59 362.2,775.59 ccw(c362.2,783.46) 370.08,783.46 370.08,842.52 ccw(c362.2,842.52)
5V on Int2 (SIG/PWR) "INT2 GND" (solid, pour order 23): 0,118.11 0,748.03 cw(c118.11,748.03) 118.11,866.14 748.03,866.14 cw(c748.03,748.03) 866.14,748.03 866.14,118.11 cw(c748.03,118.11) 748.03,0 118.11,0 cw(c118.11,118.11)
GND on Int1 (SIG/GND) "INT1 GND" (solid, pour order 19): 0,118.11 0,748.03 cw(c118.11,748.03) 118.11,866.14 748.03,866.14 cw(c748.03,748.03) 866.14,748.03 866.14,118.11 cw(c748.03,118.11) 748.03,0 118.11,0 cw(c118.11,118.11)
GND on Bottom Layer "BOT GND" (solid, remove dead copper, pour order 24): 0,118.11 0,748.03 cw(c118.11,748.03) 118.11,866.14 748.03,866.14 cw(c748.03,748.03) 866.14,748.03 866.14,118.11 cw(c748.03,118.11) 748.03,0 118.11,0 cw(c118.11,118.11)

## Silkscreen, mask and mechanical layers (free items; w line width, h text height)
Top Overlay:
  rectangle: 118.11,692.91 263.78,779.53
  lines w20: 35.43,726.38 70.87,702.76 ; 70.87,769.69 70.87,702.76 ; 102.36,726.38 70.87,702.76
Mechanical 1:
  the board outline again, w8